# EAGLE board PCB (EAGLE 9.5.2)

Size 160 x 100 mm. Coordinates in mm from the lower left corner, seen from the top.
Outline: 0,0 160,0 160,100 0,100 0,0
Copper layers (1*16): Top 0.035mm / dielectric 1.5mm / Bottom 0.035mm
Design rules "default": minimum track width 6mil, minimum drill 0.35mm, track to track 6mil, track to pad 6mil, pad to pad 6mil, via to via 6mil, smd to smd 6mil, copper to edge 40mil, drill to drill 6mil, minimum pad ring 10mil, minimum via ring 8mil, stop-mask expansion 4mil, vias tented up to drill 0mil, thermal gap 10mil

## Footprints (pad centres in the part's own frame; a part is rotated, then mirrored left to right if it is on the bottom)
1X01_OFFSET = drill 1.118 pad 1.88 offset: 1 0,0
MA04-1 = drill 1.016 long: 1 -3.81,0; 2 -1.27,0; 3 1.27,0; 4 3.81,0
SOT23 = smd 1 x 1.4: 1 -0.95,-1.1; 2 0.95,-1.1; 3 0,1.1
SOT23-3 = smd 0.8 x 0.9: 1 -0.95,-1; 2 0.95,-1; 3 0,1.1
R0402 = smd 0.7 x 0.9: 1 -0.65,0; 2 0.65,0
R0603 = smd 1 x 1.1: 1 -0.85,0; 2 0.85,0
SWITCH_SPDT_SMD = smd 1.2 x 2.5: 1 -2.5,-2.75; 2 0,-2.75; 3 2.5,-2.75 | hole 0.9: -3.55,0; 3.55,0
MA08-1 = drill 1.016 long: 1 -8.89,0; 2 -6.35,0; 3 -3.81,0; 4 -1.27,0; 5 1.27,0; 6 3.81,0; 7 6.35,0; 8 8.89,0
SIM800LMODULE = drill 0.8: DTR 10.5,1; GND -10.5,-6.5; MIC+ 10.5,-1.5; MIC- 10.5,-4; RST -10.5,1; RX -10.5,-1.5; SPK+ 10.5,-6.5; SPK- 10.5,-9; TX -10.5,-4; VCC -10.5,3.5 | drill 0.8 square: NET -10.5,6; RING 10.5,3.5

## Placement (x,y rotation side)
BTN1  [1X01_OFFSET]  -38.1,40.64 0 top  (outside the outline)
BTN2  [1X01_OFFSET]  -41.91,40.64 0 top  (outside the outline)
BTN3  [1X01_OFFSET]  -45.72,40.64 0 top  (outside the outline)
BTN-GND  [1X01_OFFSET]  -34.29,40.64 0 top  (outside the outline)
GND-BAT  [1X01_OFFSET]  -29.21,40.64 0 top  (outside the outline)
GPS  [MA04-1]  -20.32,48.26 0 top  (outside the outline)
GPS-DRIVER  [SOT23]  -22.86,41.91 0 top  (outside the outline)
GPS-POWER  MOSFET-PCHANNEL  [SOT23-3]  -22.86,53.34 0 top  (outside the outline)
GSM-DRIVER  [SOT23]  -45.72,34.29 0 top  (outside the outline)
GSM-POWER  MOSFET-PCHANNEL  [SOT23-3]  -30.48,53.34 0 top  (outside the outline)
R1  1k  [R0402]  -50.8,48.26 0 top  (outside the outline)
R2  1k  [R0402]  -15.24,54.61 0 top  (outside the outline)
R3  10k  [R0603]  -41.91,48.26 0 top  (outside the outline)
R4  10k  [R0603]  -46.99,48.26 0 top  (outside the outline)
RD1  82k  [R0402]  -36.83,48.26 0 top  (outside the outline)
RD2  120k  [R0402]  -31.75,48.26 0 top  (outside the outline)
S1  [SWITCH_SPDT_SMD]  -43.18,5.08 0 top  (outside the outline)
TBASE_L  [MA08-1]  -24.13,27.94 0 top  (outside the outline)
TBASE_R  [MA08-1]  -24.13,35.56 0 top  (outside the outline)
U$1  SIM800LMODULE  [SIM800LMODULE]  -25.4,12.7 0 top  (outside the outline)
VBAT  [1X01_OFFSET]  -49.53,40.64 0 top  (outside the outline)

## Library data of the parts
BTN1-BTN3 BTN-GND GND-BAT VBAT = SparkFun-Connectors
GPS TBASE_L TBASE_R = con-lstb; OC_FARNELL: unknown; OC_NEWARK: unknown
GPS-DRIVER GSM-DRIVER = semicon-smd-ipc
GPS-POWER GSM-POWER = User-Submitted; PROD_ID: TRANS-08285
R1-R4 RD1 RD2 = eagle-ltspice; SPICEMODEL: NONE; SPICEPREFIX: R
S1 = SparkFun-Retired
U$1 = SIM800LMODULE

## Nets
0/FLASH: BTN2.1 TBASE_R.4
2/TXD1: BTN3.1 TBASE_R.3
3.3V: TBASE_L.8
4/SDA: BTN1.1 TBASE_R.5
5/SCL: GPS-DRIVER.1 R1.1 TBASE_R.6
5V: GPS-POWER.2 GPS-POWER.3 GPS.4 R4.2 TBASE_R.1
A0: RD1.1 RD2.2 TBASE_L.2
CS/TXD2: GSM-DRIVER.1 R2.1 TBASE_L.7
GND: BTN-GND.1 GND-BAT.1 GPS-DRIVER.3 GPS.1 GSM-DRIVER.3 R1.2 R2.2 RD2.1 TBASE_R.2 U$1.GND
MISO: TBASE_L.5 U$1.RX
MOSI/RXD2: TBASE_L.6 U$1.TX
N$1: S1.2 VBAT.1
N$2: GPS-DRIVER.2 GPS-POWER.1 R4.1
N$3: GSM-POWER.2 R3.1 RD1.2 S1.3
N$4: GSM-POWER.3 U$1.VCC
N$5: GSM-DRIVER.2 GSM-POWER.1 R3.2
RST: TBASE_L.1 TBASE_L.3
RXD: GPS.2 TBASE_R.7
SCLK: TBASE_L.4 U$1.RST
TXD: GPS.3 TBASE_R.8

## Tracks (layer width: path | path; a pad name or v marks a point on that pad's centre or on a via)
0/FLASH  (1 unrouted)
2/TXD1  (1 unrouted)
4/SDA  (1 unrouted)
5/SCL  (2 unrouted)
5V  (4 unrouted)
A0  (2 unrouted)
CS/TXD2  (2 unrouted)
GND  (9 unrouted)
MISO  (1 unrouted)
MOSI/RXD2  (1 unrouted)
N$1  (1 unrouted)
N$2  (2 unrouted)
N$3  (3 unrouted)
N$4  (1 unrouted)
N$5  (2 unrouted)
RST  (1 unrouted)
RXD  (1 unrouted)
SCLK  (1 unrouted)
TXD  (1 unrouted)